# Altium PCB DC Motor_PCB.PcbDoc
Units mm, origin at the board's own origin, x right, y up, seen from the top; angles counter-clockwise.
Board outline 22.5 x 38.5 mm, 2 copper layers (Top Layer, Bottom Layer), stack 1.571 mm thick; 9 components, 7 nets, 34 pads, 3 vias.
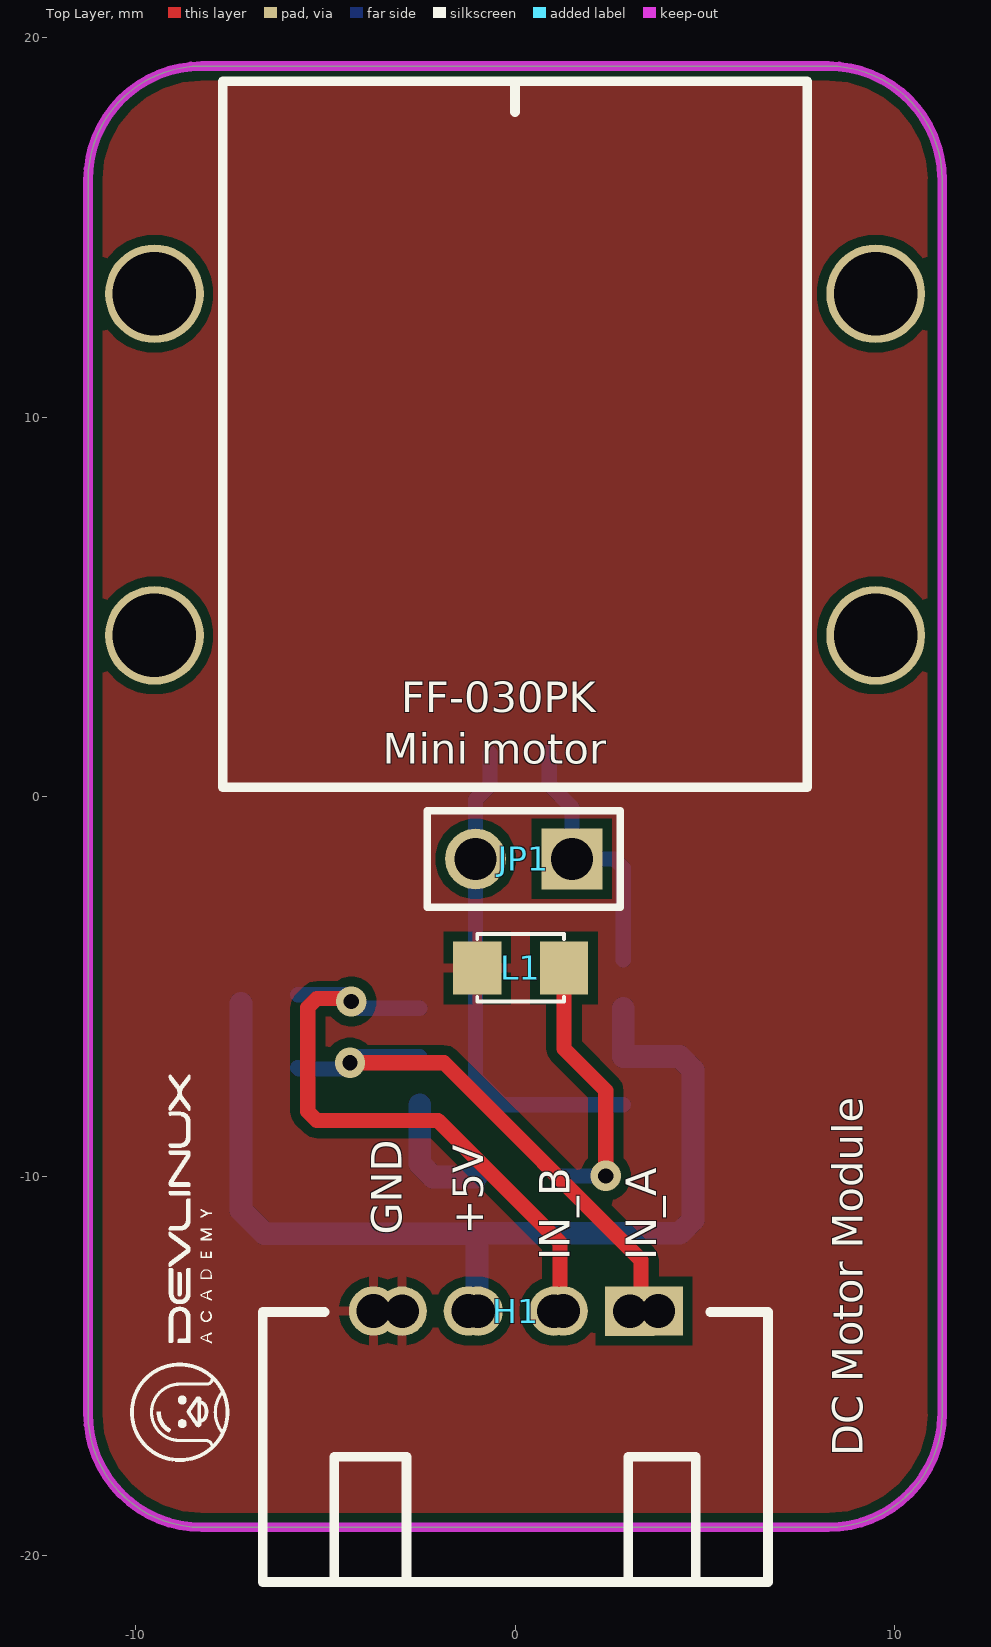
[diagram p0: Top Layer view]
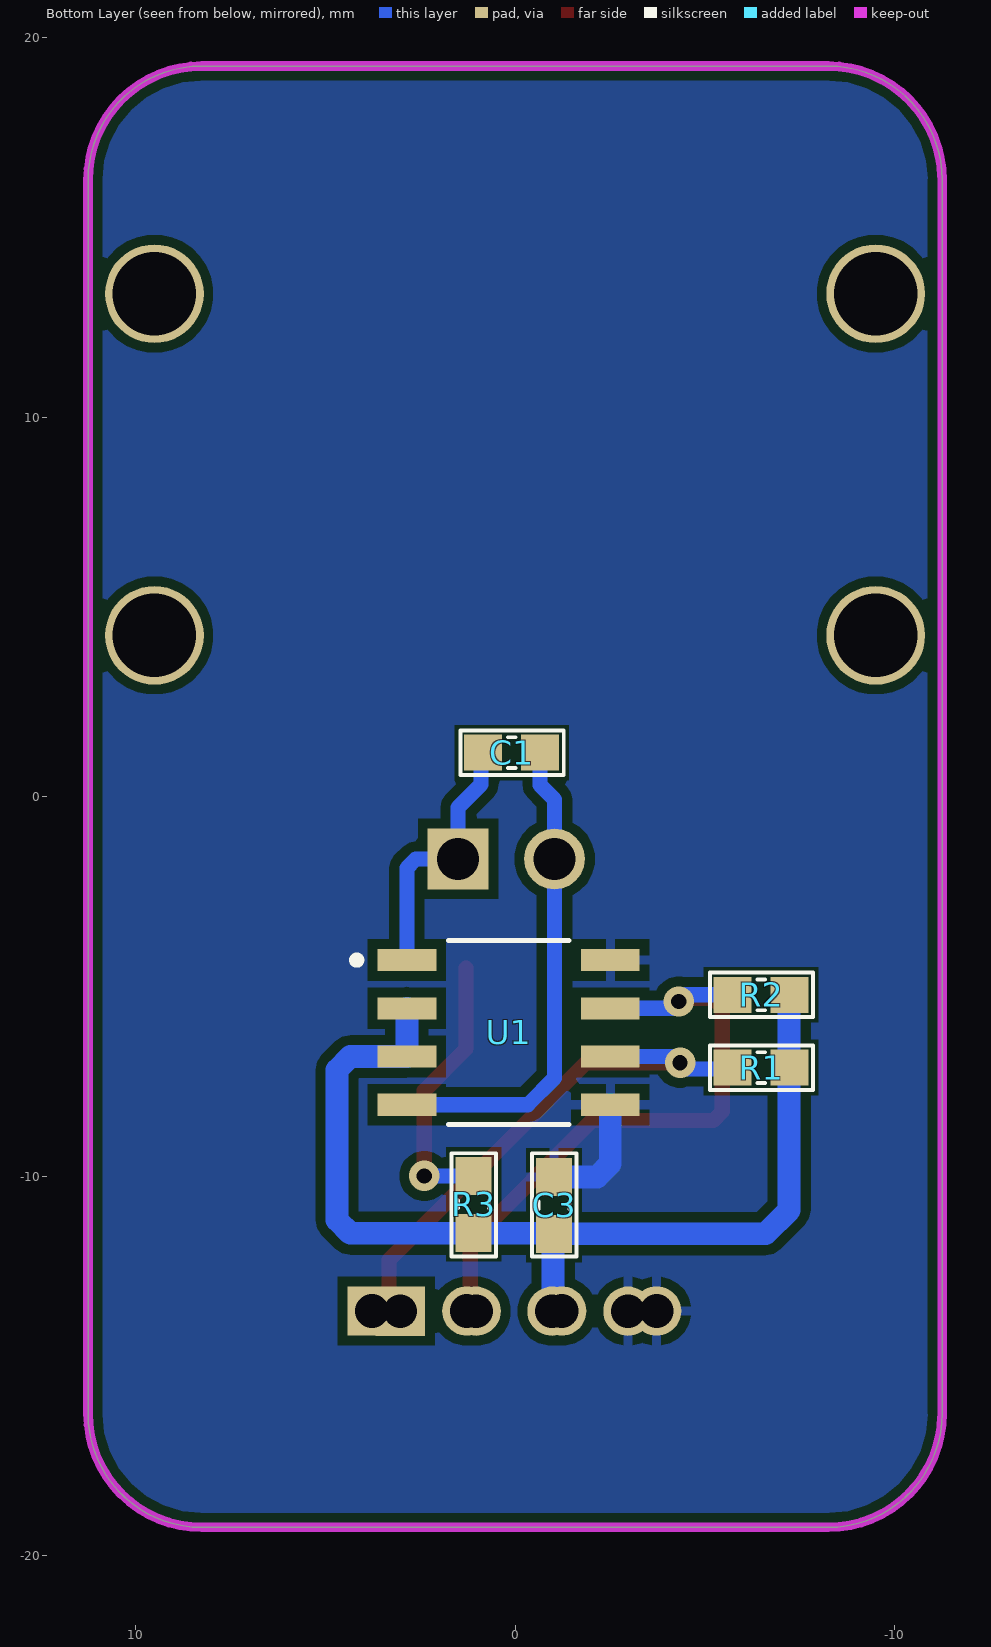
[diagram p1: Bottom Layer view, seen from below]
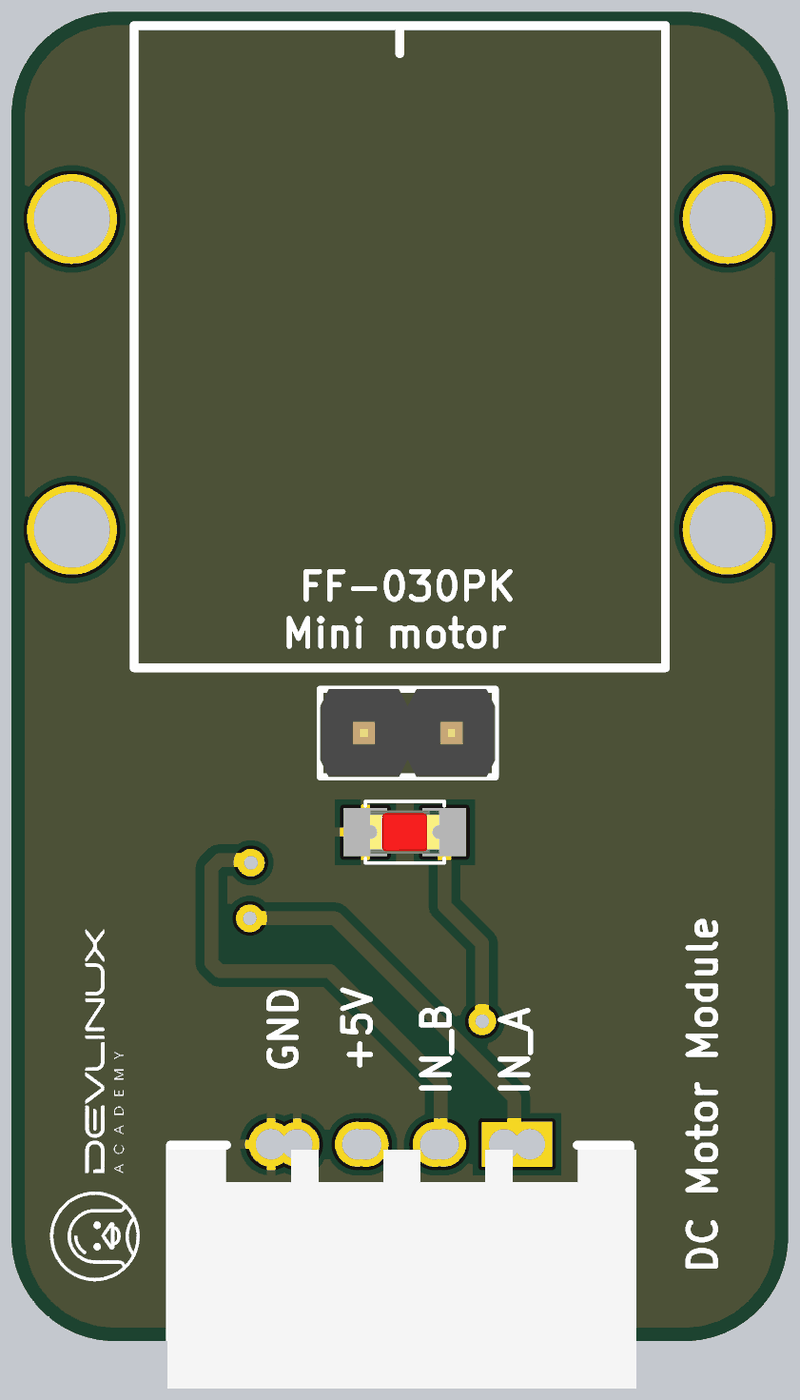
[diagram p2: 3D render of the assembled board from above, using the file's embedded part models]
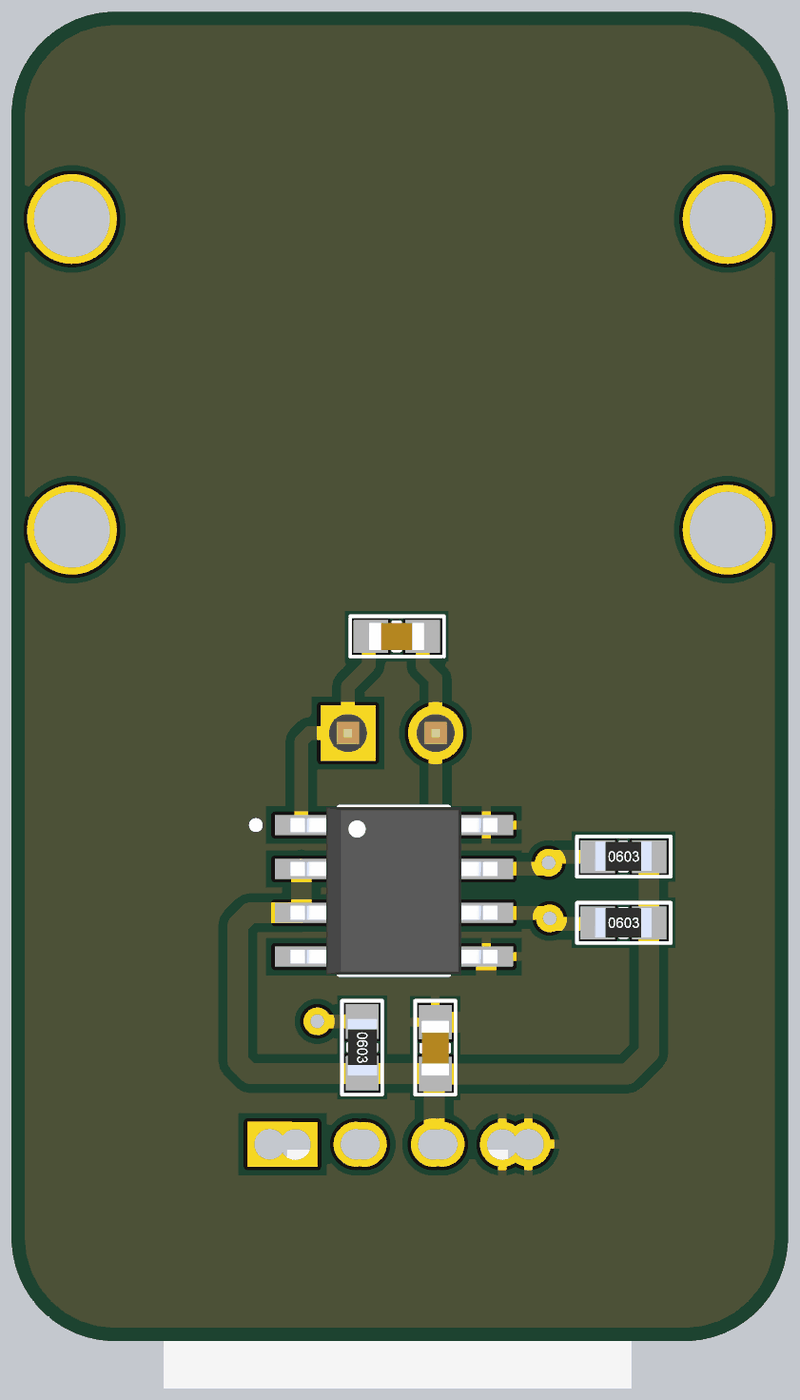
[diagram p3: 3D render of the assembled board from below, using the file's embedded part models]

## Layer stack, top to bottom
Top Solder: solder mask 0.0102, Solder Resist, Dk 3.5
Top Layer: signal copper 0.0356
Dielectric 1: dielectric 1.5, FR-4, Dk 4.8
Bottom Layer: signal copper 0.0356
Bottom Solder: solder mask 0.0102, Solder Resist, Dk 3.5

## Board outline
-11.25,-16.25 -11.25,16.25 cw(c-8.25,16.25) -8.25,19.25 8.25,19.25 cw(c8.25,16.25) 11.25,16.25 11.25,-16.25 cw(c8.25,-16.25) 8.25,-19.25 -8.25,-19.25 cw(c-8.25,-16.25)

## Design rules (kind name [scope] priority, off if disabled: settings)
Clearance [All] p1: gap=0.254 ignorepadtopadclearanceinfootprint=FALSE except(0: Arc-Hole Track-Hole SMDPad-Hole THPad-Hole Via-Hole Fill-Hole Poly-Hole Region-Hole Text-Hole)
PolygonConnect [All] p1: connectstyle=Relief reliefconductorwidth=0.254 reliefentries=4 polygonreliefangle="90 Angle" airgapwidth=0.254
RoomDefinition "DC Motor_SCH" [InComponentClass('DC Motor_SCH')] p1: confinementstyle=ConfineIn formatcopy=TRUE lockcomponents=FALSE outline -2.171,-52.37 42.025,-52.37 42.025,-21.255 -2.171,-21.255
RoutingVias [All] p1: holewidth=0.4 width=0.8 viastyle="Through Hole" minholewidth=0.3 minwidth=0.6 maxholewidth=0.5 maxwidth=1
SolderMaskExpansion [All] p1: expansion=0.102 istentingtop=FALSE
Width [All] p1: maxlimit=0.6 minlimit=0.254 preferedwidth=0.4
30 further rules are at their usual default settings.

## Components (designator, comment, footprint, x,y, rotation, side; value= is the part's Value field where it differs from the comment)
C1 "100nF" "tu 0603" 0.09,1.16 r180 bottom
C3 "100nF" "tu 0603" -1.03,-10.765 r90 bottom
H1 "Header 4P 2.54 + 2.0 Duc Cong" "Header 4P DC 2.54 + 2.0" 3.745,-13.575 r270 top
JP1 "JP 1x2 2.54" "JP 1x2 DT" 1.5,-1.64 r180 top
L1 "LED RED" LED-0805-Red 1.29,-4.51 r180 top
R1 "1k" "tro smd 0603" -6.481,-7.138 r180 bottom
R2 "1K" "tro smd 0603" -6.481,-5.218 r180 bottom
R3 "1k" "tro smd 0603" 1.09,-10.74 r270 bottom
U1 "L9110S" SOIC127P599X172-8N 0.17,-6.21 r180 bottom

## Footprints (in the part's own frame and the unit in brackets; to place one, negate y for a bottom-side part, rotate by r counter-clockwise, add the part's x,y. Pads: shape width x height; smd on the part's side, far side on the other; paste and mask are expansions set on the pad)
"Header 4P DC 2.54 + 2.0" [mm]
  rect 1.3x1.3 hole 0.889: 1(-0.025,0.025) 1(-0.022,-0.719)
  round 1.3 hole 0.889: 2(-0.025,-2.475) 2(-0.022,-2.719) 3(-0.025,-4.975) 3(-0.022,-4.719) 4(-0.025,-7.475) 4(-0.022,-6.718)
  silkscreen extent 0,-10.39 7.11,2.92, body extent 0.13,-10.48 7.06,3.11, height 7.38
"JP 1x2 DT" [mm] "2 pins, 1 row, straight, gold plating"
  rect 1.6x1.6 hole 1.1: 1(0,0)
  round 1.6 hole 1.1: 2(2.54,0)
  silkscreen extent -1.27,-1.27 3.81,1.27, body extent -1.27,-1.27 3.81,1.27, height 8.54
LED-0805-Red [mil]
  rect 50x55 smd: 1(0,0) 2(90,0)
  silkscreen extent 0,-35 90,35, body extent 5,-25 85,25, height 43
SOIC127P599X172-8N [mm]
  rect 1.55x0.58 smd: 1(-2.68,1.905) 2(-2.68,0.635) 3(-2.68,-0.635) 4(-2.68,-1.905) 5(2.68,-1.905) 6(2.68,-0.635) 7(2.68,0.635) 8(2.68,1.905)
  silkscreen extent -4.1,-2.43 1.59,2.43, body extent -3,-2.43 3,2.43, height 1.73
"tro smd 0603" [mm] "Chip Capacitor, 2-Leads, Body 1,60x0,80mm, IPC Medium Density"
  rect 1x0.95 smd mask+0.076: 1(-0.75,0) 2(0.75,0)
  silkscreen extent -1.35,-0.58 1.37,0.58, body extent -0.82,-0.42 0.82,0.43, height 0.44
"tu 0603" [mm] "Chip Capacitor, 2-Leads, Body 1,60x0,80mm, IPC Medium Density"
  rect 1x0.95 smd mask+0.076: 1(-0.75,0) 2(0.75,0)
  silkscreen extent -1.35,-0.58 1.37,0.58, body extent -0.8,-0.4 0.8,0.4, height 0.9

## Part data
C1 C3: library part "Tu 0603 104 50V 10%", "Dán", Chung_Loai=Dán, Don_Vi=Con, Ma_Hang=MH004568, So_Chan=2, Ten_Linh_Kien="Tụ 0603 104-100nF 10% 50V"
H1: "Cắm", Chung_Loai=Cắm, Don_Vi=Con, Ma_Hang=MH001310, Ten_Linh_Kien="Header 4P XH2.54-4P Đực Cong"
JP1: library part "JP 1x2 2.54 Duc Thang", "Cắm", Chung_Loai=Cắm, Don_Vi=Con, Ma_Hang=MH000903, Ten_Linh_Kien="Jump Đơn Đực 2.54MM 1x40P Thẳng 11MM"
L1: library part "LED 0805 Do", "Dán", Chung_Loai=Dán, Don_Vi=Con, Ma_Hang=MH000897, Ten_Linh_Kien="LED 0805 Màu Đỏ (Red)"
R1 R2 R3: library part "Tro 0603 1% 1k", "Dán", Chung_Loai=Dán, Don_Vi=Con, Ma_Hang=MH006334, So_Chan=2, Ten_Linh_Kien="Trở 0603 1% 1k"
U1: "SOP-8 MOTOR DRIVER ICS ROHS", Package=None, Check_prices=https://www.snapeda.com/parts/L9110S/Onsemi/view-part/?ref=eda, MF="ON Semiconductor", MP=L9110S, SnapEDA_Link=https://www.snapeda.com/parts/L9110S/Onsemi/view-part/?ref=snap

## Free pads (board coordinates)
  round 2.6 hole 2.2: 12(-9.5,4.25) 12(-9.5,13.25) 12(9.5,4.25) 12(9.5,13.25)

## Via types
v1: diameter 0.8, hole 0.4, Top Layer to Bottom Layer, 3 vias

## Nets (pads, with @x,y where several pads share a name; then routed paths per layer and width w, separated by ;. In a path a pad name is that pad's centre, name@x,y a point inside that pad or via, vN(x,y) a via of type N, cw(c..) or ccw(c..) an arc to the next point about the centre after c; other vN are vias at no path point)
+5: C3.1 H1.3 R1.2 R2.2 R3.2 U1.2 U1.3 | length 27
  Bottom Layer w0.6: R2.2@-7.221,-5.448 -7.221,-10.895 -6.6,-11.515 C3.1 ; H1.3@-0.974,-13.553 -1.002,-13.525 -1.002,-11.543 C3.1 ; U1.2 U1.3 4.339,-6.845 4.69,-7.196 4.69,-11.151 4.339,-11.503 1.09,-11.503 -1.017,-11.503 C3.1
GND: C3.2 H1.4 L1.2 U1.5 U1.8 | length 3.2
  Bottom Layer w0.6: U1.5 -2.51,-9.664 -2.159,-10.015 C3.2
IN_A: H1.1 R1.1 U1.6 | length 14.7
  Top Layer w0.4: v1(-4.347,-7.007) -1.873,-7.007 3.32,-12.2 3.32,-13.1 H1.1@3.77,-13.55
  Bottom Layer w0.4: R1.1 -5.698,-7.17 -4.51,-7.17 v1(-4.347,-7.007) -4.185,-6.845 U1.6
IN_B: H1.2 R2.1 U1.7 | length 17.3
  Top Layer w0.4: v1(-4.314,-5.396) -4.39,-5.32 -5.226,-5.32 -5.46,-5.554 -5.46,-8.296 -5.226,-8.53 -2.03,-8.53 1.18,-11.74 1.18,-13.399 H1.2@1.026,-13.553
  Bottom Layer w0.4: R2.1 -4.492,-5.218 v1(-4.314,-5.396) -4.135,-5.575 U1.7
NetC1_1: C1.1 JP1.1 U1.1 | length 7
  Bottom Layer w0.4: C1.1 0.901,1.099 0.901,0.319 1.5,-0.28 JP1.1 2.616,-1.64 2.85,-1.874 U1.1
NetC1_2: C1.2 JP1.2 U1.4 | length 12.9
  Bottom Layer w0.4: C1.2 -0.66,0.31 -1.04,-0.07 JP1.2 -1.04,-7.41 -0.335,-8.115 U1.4
NetL1_1: L1.1 R3.1 | length 7.2
  Top Layer w0.4: L1.1 1.29,-6.64 2.39,-7.74 v1(2.39,-9.99)
  Bottom Layer w0.4: R3.1 v1(2.39,-9.99)

## Polygon pours and split planes (outlines as drawn)
GND on Bottom Layer "NONET_L-01_P-001" (solid, remove dead copper, pour order 0): -12.08,20.48 -12.03,20.53 12.14,20.53 12.14,-19.53 14.08,-21.47 -13.39,-21.47
GND on Top Layer "NONET_L-01_P-001" (solid, remove dead copper, pour order 1): -10.77,20.7 12.54,20.7 13.45,19.79 13.45,-21.35 -12.48,-21.35 -12.71,-21.58

## Keep-outs
Keep-Out Layer:
  the board outline again, w0.254

## Silkscreen, mask and mechanical layers (free items; w line width, h text height)
Top Overlay:
  drawing of 26 lines, arcs and shapes, not listed
  text "FF-030PK" at -3,2.23 h0.8
  text "Mini motor" at -3.49,0.87 h0.8
  text "GND" at -2.99,-11.544 h0.8 r90
  text "+5V" at -0.843,-11.544 h0.8 r90
  text "IN_B" at 1.437,-12.21 h0.8 r90
  text "IN_A" at 3.717,-12.21 h0.8 r90
  text "DC Motor Module" at 9.16,-17.37 h0.8 r90